# EAGLE board Select-Fire Rapidstrike (EAGLE 9.4.2)
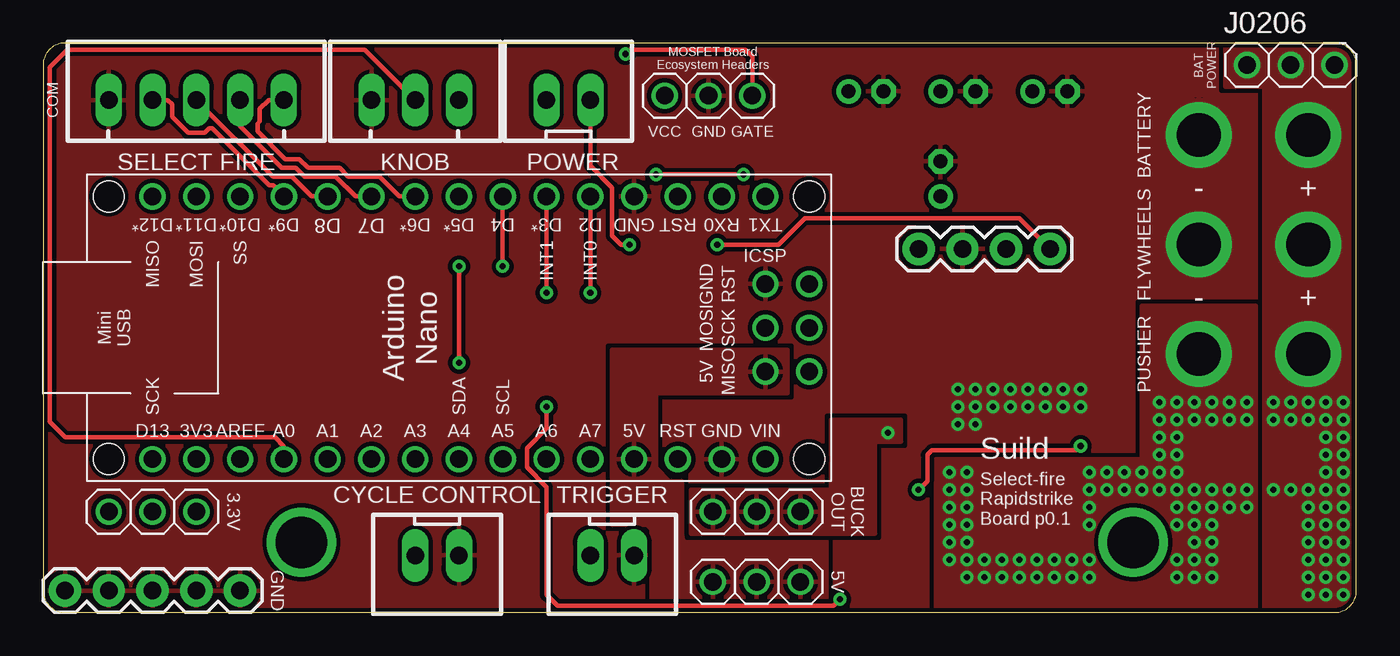
[diagram p0: board, top side]
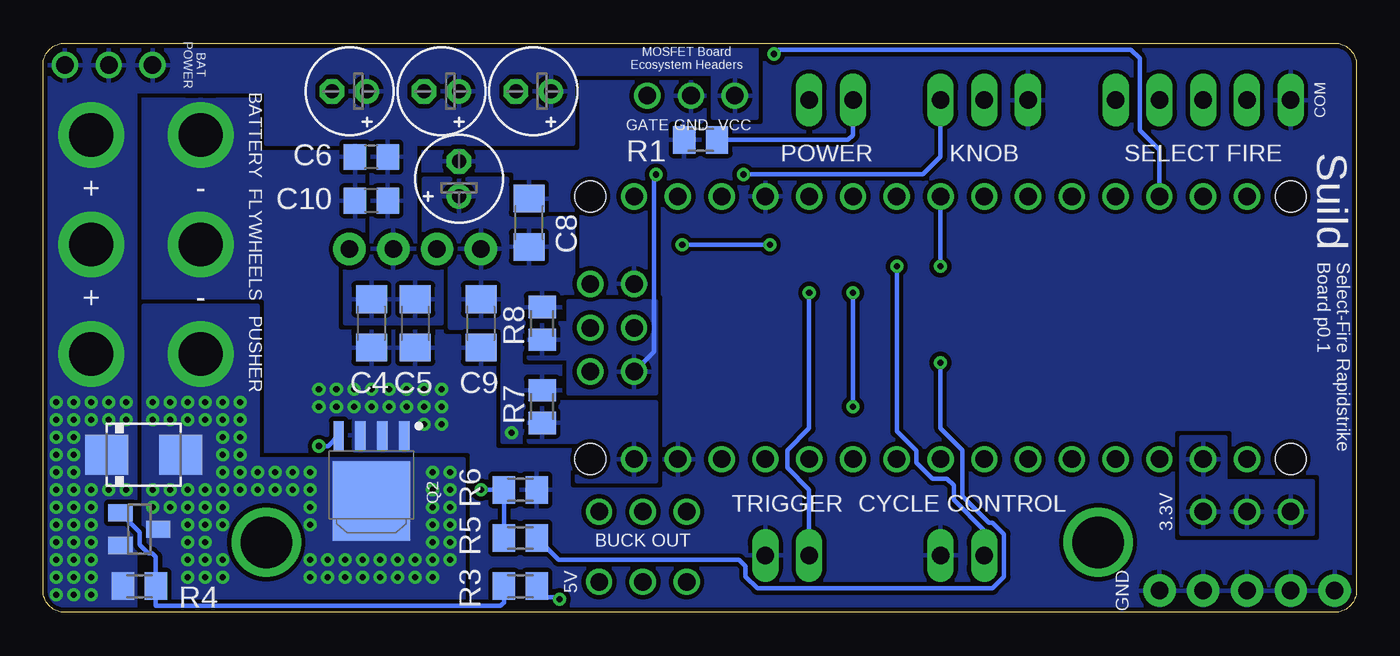
[diagram p1: board, bottom side, seen from below]

Size 76.2 x 33.02 mm. Coordinates in mm from the lower left corner, seen from the top.
Outline: 1.27,0 74.93,0 arc90 76.2,1.27 76.2,31.75 arc90 74.93,33.02 1.27,33.02 arc90 0,31.75 0,1.27 arc90 1.27,0
Copper layers (1*16): Top 0.035mm / dielectric 1.5mm / Bottom 0.035mm
Design rules "default *": minimum track width 10mil, minimum drill 0.35mm, track to track 10mil, track to pad 10mil, pad to pad 10mil, via to via 10mil, smd to smd 10mil, copper to edge 10mil, drill to drill 10mil, minimum pad ring 10mil, minimum via ring 8mil, stop-mask expansion 4mil, vias tented up to drill 30mil, thermal gap 10mil

## Footprints (pad centres in the part's own frame; a part is rotated, then mirrored left to right if it is on the bottom)
E2-5 = drill 0.813 pad 1.422: + -1.016,0 | drill 0.813 pad 1.422 octagon: - 1.016,0
C1206 = smd 1.6 x 1.8: 1 -1.4,0; 2 1.4,0
C0805 = smd 1.3 x 1.5: 1 -0.95,0; 2 0.95,0
DO214AA = smd 2.5 x 2.3: A 2.15,0; C -2.15,0
MOUNT-HOLE-2.5MM = drill 2.54 pad 3.81: P$1 0,0
MOUNT_HOLE_3MM = drill 2.997: P$1 0,0
1X04 = drill 1.016 pad 1.88: 1 0,0; 2 2.54,0; 3 5.08,0; 4 7.62,0
JST-XH-02-PACKAGE-LONG-PAD = drill 1.016 long: 1 -1.27,0; 2 1.27,0
JST-XH-03-PACKAGE-LONG-PAD = drill 1.016 long: 1 -2.54,0; 2 0,0; 3 2.54,0
JST-XH-05-PACKAGE-LONG-PAD = drill 1.016 long: 1 -5.08,0; 2 -2.54,0; 3 0,0; 4 2.54,0; 5 5.08,0
1X03 = drill 1.016: 1 -2.54,0; 2 0,0; 3 2.54,0
1X05 = drill 1.016 pad 1.88: 1 0,0; 2 2.54,0; 3 5.08,0; 4 7.62,0; 5 10.16,0
SOT-23 = smd 1 x 1.4: 1 -0.95,-1.1; 2 0.95,-1.1; 3 0,1.1
TO127P600X120-5N = smd 1.65 x 0.6: 1 -2.65,1.905; 2 -2.65,0.635; 3 -2.65,-0.635; 4 -2.65,-1.905 | smd 4.6 x 4.5: 5 1.15,0
M0805 = smd 1.3 x 1.6: 1 -0.95,0; 2 0.95,0
ARDUINO_NANO = drill 1.016: P1 -7.62,16.51; P2 -7.62,13.97; P3 -7.62,11.43; P4 -7.62,8.89; P5 -7.62,6.35; P6 -7.62,3.81; P7 -7.62,1.27; P8 -7.62,-1.27; P9 -7.62,-3.81; P10 -7.62,-6.35; P11 -7.62,-8.89; P12 -7.62,-11.43; P13 -7.62,-13.97; P14 -7.62,-16.51; P15 -7.62,-19.05; P16 7.62,-19.05; P17 7.62,-16.51; P18 7.62,-13.97; P19 7.62,-11.43; P20 7.62,-8.89; P21 7.62,-6.35; P22 7.62,-3.81; P23 7.62,-1.27; P24 7.62,1.27; P25 7.62,3.81; P26 7.62,6.35; P27 7.62,8.89; P28 7.62,11.43; P29 7.62,13.97; P30 7.62,16.51; P31 -2.54,19.05; P32 -2.54,16.51; P33 0,19.05; P34 0,16.51; P35 2.54,19.05; P36 2.54,16.51 | hole 1.778: -7.62,19.05; 7.62,19.05; -7.62,-21.59; 7.62,-21.59

## Placement (x,y rotation side)
C1  47uF  [E2-5]  58.42,30.23 180 bottom
C2  47uF  [E2-5]  53.09,30.23 180 bottom
C3  47uF  [E2-5]  47.75,30.23 180 bottom
C4  10uF  [C1206]  57.15,16.76 270 bottom
C5  10uF  [C1206]  54.61,16.76 270 bottom
C6  1uF  [C0805]  57.15,26.42 180 bottom
C7  47uF  [E2-5]  52.07,25.15 90 bottom
C8  10uF  [C1206]  48.01,22.61 90 bottom
C9  10uF  [C1206]  50.8,16.76 270 bottom
C10  0.1uF  [C0805]  57.15,23.88 180 bottom
D1  [DO214AA]  70.36,9.14 0 bottom
H1  B+  [MOUNT-HOLE-2.5MM]  73.41,27.69 0 top
H2  B-  [MOUNT-HOLE-2.5MM]  67.06,21.34 0 top
H3  M+  [MOUNT-HOLE-2.5MM]  73.41,14.99 0 top
H4  M+  [MOUNT-HOLE-2.5MM]  67.06,27.69 0 top
H5  MOUNT_HOLE_3MM  [MOUNT_HOLE_3MM]  14.99,4.06 0 top
H6  MOUNT_HOLE_3MM  [MOUNT_HOLE_3MM]  63.25,4.06 0 top
H7  M+  [MOUNT-HOLE-2.5MM]  73.41,21.34 0 top
H8  M-  [MOUNT-HOLE-2.5MM]  67.06,14.99 0 top
J1  BUCK  [1X04]  58.42,21.08 180 top
J2  POWER  [JST-XH-02-PACKAGE-LONG-PAD]  30.48,29.72 0 top
J7  POT  [JST-XH-03-PACKAGE-LONG-PAD]  21.59,29.72 0 top
J8  TRIGGER  [JST-XH-02-PACKAGE-LONG-PAD]  33.02,3.3 180 top
J9  CYCLE CONTROL  [JST-XH-02-PACKAGE-LONG-PAD]  22.86,3.3 180 top
J10  SELECT FIRE  [JST-XH-05-PACKAGE-LONG-PAD]  8.89,29.72 0 top
J0205  [1X03]  38.61,29.97 0 top
J0206  [1X03]  72.39,31.75 0 top
J0207  [1X03]  41.4,5.84 0 top
J0208  [1X03]  41.4,1.78 180 top
J0209  [1X03]  6.35,5.84 0 top
J0210  [1X05]  1.27,1.27 0 top
Q1  SSM3J358RLFCT-ND  [SOT-23]  70.61,4.83 270 bottom
Q2  PSMN1R5-30YLC  [TO127P600X120-5N]  57.15,7.62 270 bottom
R1  0  [M0805]  38.05,27.41 0 bottom
R3  100  [M0805]  48.51,1.52 180 bottom
R4  10k  [M0805]  70.61,1.52 180 bottom
R5  100  [M0805]  48.51,4.32 180 bottom
R6  10k  [M0805]  48.51,7.11 180 bottom
R7  0  [M0805]  47.24,11.94 270 bottom
R8  0  [M0805]  47.24,16.76 270 bottom
U2  ARDUINO_NANO  [ARDUINO_NANO]  25.4,16.51 270 top

## Library data of the parts
C1-C3 C7 J0205-J0209 R1 R3-R7 = adafruit
C4 C5 C8 C9 = eagle-ltspice; SPICEMODEL: NONE; SPICEPREFIX: C
C6 C10 = rcl; SPICEPREFIX: C
D1 = s2x_10; MF: Fairchild; MPN: S2A; OC_FARNELL: 1467485; OC_NEWARK: 58K2391
H1-H8 Q2 U2 = my-eagle-lib
J1 = SparkFun-Connectors; PROD_ID: CONN-09696
J2 J7-J10 = Rembrandt Electronics - JST XH Connectors v1-0
J0210 = SparkFun-Connectors
Q1 = bt_transistor
R8 = adafruit; STUFF: NO_STUFF

## Nets
BUCK_EN: J1.1 J2.2
BUCK_EN_SW: J2.1 R1.2
CYC_CTRL_IN: J9.2 U2.P7
GND: C1.- C2.- C3.- C4.2 C5.2 C6.2 C7.- C8.2 C9.2 C10.2 H2.P$1 H4.P$1 J1.3 J7.1 J8.1 J9.1 J10.1 J0205.2 J0210.1 J0210.2 J0210.3 J0210.4 J0210.5 Q2.1 Q2.2 Q2.3 R1.1 R6.1 U2.P4 U2.P29 U2.P32
HI_SIDE_GATE: Q1.1 R3.2 R4.1
LOW_SIDE_GATE: Q2.4 R5.2 R6.2
MOSFET_BOARD_GATE: J0205.3 U2.P13
MOTOR_BRAKE: R3.1 U2.P6
MOTOR_DRIVE: R5.1 U2.P8
POT_IN: J7.2 U2.P19
PP3V3_AR: J0209.1 J0209.2 J0209.3 U2.P17
PP5V0_AR: J7.3 J0208.1 J0208.2 J0208.3 R8.2 U2.P27 U2.P36
PP_BATT: C1.+ C2.+ C3.+ C4.1 C5.1 C6.1 C10.1 D1.C H1.P$1 H3.P$1 H7.P$1 J1.2 J0205.1 J0206.1 J0206.2 J0206.3 Q1.2 R4.2
PP_BUCK_OUT: C7.+ C8.1 C9.1 J1.4 J0207.1 J0207.2 J0207.3 R7.1 R8.1
PUSHER_NEG: D1.A H8.P$1 Q1.3 Q2.5
SEL_FR_<0>: J10.5 U2.P9
SEL_FR_<1>: J10.4 U2.P10
SEL_FR_<2>: J10.3 U2.P11
SEL_FR_<3>: J10.2 U2.P12
TRIG_IN: J8.2 U2.P5
VIN_AR: R7.2 U2.P30

## Tracks (layer width: path | path; a pad name or v marks a point on that pad's centre or on a via)
BUCK_EN  (via drill 0.35)
  Top 0.254: J1.1 56.64,22.86 44.2,22.86 42.67,21.34 v39.12,21.34 | J2.2 31.75,25.91 33.02,24.64 33.02,21.84 33.53,21.34 v34.04,21.34
  Bottom 0.254: v34.04,21.34 v39.12,21.34
BUCK_EN_SW
  Bottom 0.254: R1.2 29.49,27.41 29.21,27.69 J2.1
CYC_CTRL_IN  (via drill 0.35)
  Top 0.254: v26.67,20.07 U2.P7
  Bottom 0.254: v26.67,20.07 26.67,10.51 25.53,9.36 25.53,8.67 24.6,7.75 23.75,7.75 23.37,7.37 23.37,6.52 21.59,4.74 J9.2
GND  (via drill 0.35)
  other vias: 54.1,10.92 54.1,11.94 55.12,11.94 53.09,10.92 53.09,11.94 58.17,11.94 57.15,11.94 56.13,11.94 60.2,11.94 59.18,11.94 54.1,12.95 55.12,12.95 53.09,12.95 58.17,12.95 57.15,12.95 56.13,12.95 60.2,12.95 59.18,12.95
  pour Bottom (rank 6, no thermals): 52.58,9.4 58.17,9.4 58.17,11.43 60.71,11.43 60.71,13.46 52.58,13.46
  pour Bottom (rank 6, no thermals): 63.75,18.29 70.36,18.29 70.36,29.72 63.75,29.72
  pour Top (rank 6, no thermals): 52.58,13.46 52.58,9.4 58.17,9.4 58.17,11.43 60.71,11.43 60.71,13.46
  pour Top (rank 6, no thermals): 63.75,29.72 70.36,29.72 70.36,18.29 63.75,18.29
  pour Top (rank 6): -0.51,-0.51 -0.51,33.53 76.71,33.53 76.71,-0.51
  pour Bottom (rank 6): -0.51,33.53 76.71,33.53 76.71,-0.51 -0.51,-0.51
HI_SIDE_GATE
  Bottom 0.254: Q1.1 70.59,4.66 70.59,3.91 70.12,3.44 69.88,3.44 69.66,3.22 R4.1 69.66,0.38 49.66,0.38 49.53,0.51 49.46,0.57 R3.2
LOW_SIDE_GATE  (via drill 0.35)
  Top 0.254: v50.8,7.11 51.31,7.62 51.31,9.14 51.56,9.4 59.94,9.4 v60.2,9.65
  Bottom 0.254: Q2.4 59.67,9.65 v60.2,9.65 | v50.8,7.11 | v50.8,7.11 R6.2 R5.2
MOSFET_BOARD_GATE  (via drill 0.35)
  Top 0.254: J0205.3 41.15,32.26 40.77,32.64 34.03,32.64 v33.78,32.39
  Bottom 0.254: U2.P13 11.43,26.83 12.57,27.98 12.57,32.13 13.08,32.64 33.53,32.64 v33.78,32.39
MOTOR_BRAKE  (via drill 0.35)
  Top 0.254: U2.P6 v29.21,18.54 | v29.21,11.94 29.21,10.67 28.07,9.53 28.07,8.42 29.21,7.27 29.21,1.02 29.84,0.38 45.85,0.38 v46.23,0.76
  Bottom 0.254: v29.21,18.54 v29.21,11.94 | R3.1 47.56,0.89 46.35,0.89 v46.23,0.76
MOTOR_DRIVE  (via drill 0.35)
  Top 0.254: v24.13,14.48 v24.13,20.07
  Bottom 0.254: R5.1 46.29,3.05 35.81,3.05 35.43,2.67 35.43,2.07 34.76,1.4 21.12,1.4 20.45,2.07 20.45,4.54 21.12,5.21 21.34,5.21 22.86,6.73 22.86,9.4 24.13,10.67 v24.13,14.48 | v24.13,20.07 U2.P8
POT_IN
  Top 0.254: J7.2 18.67,32.64 1.4,32.64 0.38,31.62 0.38,11.05 1.27,10.16 13.46,10.16 13.97,9.65 U2.P19
PP3V3_AR
  pour Bottom: 7.62,10.16 10.16,10.16 10.16,4.57 2.54,4.57 2.54,7.62 7.62,7.62
PP5V0_AR  (via drill 0.35)
  Top 0.254: v35.56,25.4 v40.64,25.4
  Bottom 0.254: J7.3 24.13,26.42 25.15,25.4 v35.56,25.4 | U2.P36 40.77,15.11 40.77,25.27 v40.64,25.4
  pour Top (rank 3): 33.02,5.08 33.02,15.24 43.18,15.24 43.18,12.7 35.56,12.7 35.56,8.38 36.32,7.62 37.08,7.62 37.08,4.32 45.47,4.32 45.47,0.76 35.31,0.76 35.31,4.83 35.05,5.08
  pour Bottom: 40.64,12.7 45.72,12.7 45.72,14.73 48.01,14.73 48.01,16.76 45.72,16.76 45.72,18.03 40.64,18.03
PP_BATT  (via drill 0.35)
  other vias: 75.44,4.06 75.44,3.05 75.44,2.03 75.44,1.02 75.44,8.13 75.44,7.11 75.44,6.1 75.44,5.08 74.42,4.06 74.42,3.05 74.42,2.03 74.42,1.02 74.42,8.13 74.42,7.11 74.42,6.1 74.42,5.08 73.41,4.06 73.41,3.05 73.41,2.03 73.41,1.02 73.41,6.1 73.41,5.08 71.37,12.19 71.37,11.18 73.41,12.19 73.41,11.18 72.39,12.19 72.39,11.18 75.44,12.19 75.44,11.18 75.44,10.16 75.44,9.14 74.42,12.19 74.42,11.18 74.42,10.16 74.42,9.14 71.37,7.11 73.41,7.11 72.39,7.11
  pour Bottom: 34.8,33.27 76.45,33.27 76.45,29.46 70.87,29.46 70.87,30.23 63.25,30.23 63.25,27.18 57.15,27.18 57.15,20.57 58.67,20.57 58.67,16.76 53.09,16.76 53.09,20.57 54.61,20.57 54.61,27.18 45.47,27.18 45.47,31.24 37.34,31.24 37.34,28.7 34.8,28.7
  pour Bottom (no thermals): 70.87,30.23 76.45,30.23 76.45,-0.25 70.87,-0.25
  pour Top (no thermals): 68.58,33.27 76.45,33.27 76.45,-0.25 70.87,-0.25 70.87,30.48 68.58,30.48
PP_BUCK_OUT  (via drill 0.35)
  other vias: 49.02,10.41
  pour Bottom (rank 3): 49.28,25.15 54.1,25.15 54.1,21.84 52.58,21.84 52.58,16.51 49.53,16.51 49.53,9.91 48.26,9.91 48.26,12.45 45.47,12.45 45.47,22.86 49.28,22.86
  pour Top: 37.59,7.11 37.59,4.57 48.26,4.57 48.26,9.91 49.78,9.91 49.78,11.18 45.72,11.18 45.72,7.11
PUSHER_NEG  (via drill 0.35)
  other vias: 53.59,2.03 53.59,3.05 54.61,3.05 52.58,7.11 52.58,8.13 52.58,4.06 52.58,5.08 52.58,6.1 53.59,7.11 53.59,8.13 53.59,4.06 53.59,5.08 53.59,6.1 58.67,3.05 59.69,2.03 59.69,3.05 60.71,3.05 58.67,2.03 55.63,3.05 56.64,2.03 56.64,3.05 57.66,3.05 55.63,2.03 60.71,5.08 60.71,6.1 54.61,2.03 57.66,2.03 67.82,4.06 67.82,3.05 66.8,3.05 66.8,5.08 66.8,4.06 66.8,2.03 67.82,2.03 60.71,2.03 65.79,2.03 66.8,6.1 65.79,6.1 65.79,3.05 66.8,7.11 65.79,5.08 64.77,12.19 66.8,11.18 67.82,11.18 66.8,12.19 65.79,12.19 65.79,11.18 69.85,12.19 68.83,12.19 69.85,11.18 67.82,12.19 68.83,11.18 64.77,11.18 69.85,6.1 69.85,7.11 65.79,9.14 68.83,6.1 65.79,10.16 67.82,5.08 67.82,6.1 64.77,10.16 64.77,9.14 52.58,3.05 60.71,7.11 60.71,8.13 61.72,8.13 61.72,7.11 63.75,8.13 62.74,8.13 62.74,7.11 63.75,7.11 65.79,7.11 65.79,8.13 64.77,8.13 64.77,7.11 67.82,7.11 68.83,7.11
  pour Bottom (rank 2, no thermals): 63.75,17.78 70.36,17.78 70.36,-0.25 51.82,-0.25 51.82,8.89 63.75,8.89
  pour Top (rank 2, no thermals): 63.75,17.78 70.36,17.78 70.36,-0.25 51.82,-0.25 51.82,8.89 63.75,8.89
SEL_FR_<0>
  Top 0.254: U2.P9 20.67,24.13 19.52,25.27 17.7,25.27 17.19,25.78 15.37,25.78 14.86,26.29 14.05,26.29 12.45,27.9 12.45,28.36 12.57,28.48 12.57,29.21 13.08,29.72 J10.5
SEL_FR_<1>
  Top 0.254: U2.P10 18.13,24.13 16.98,25.27 15.16,25.27 14.65,25.78 13.84,25.78 11.43,28.19 J10.4
SEL_FR_<2>
  Top 0.254: J10.3 13.34,25.27 14.44,25.27 15.59,24.13 U2.P11
SEL_FR_<3>
  Top 0.254: U2.P12 13.34,24.77 13.12,24.77 9.8,28.09 9.64,28.09 9.36,27.81 8.42,27.81 7.49,28.74 7.49,29.46 7.24,29.72 J10.2
TRIG_IN  (via drill 0.35)
  Top 0.254: v31.75,18.54 U2.P5
  Bottom 0.254: J8.2 31.75,7.11 33.02,8.38 33.02,9.4 31.75,10.67 v31.75,18.54
VIN_AR
  pour Bottom: 40.64,7.62 45.21,7.62 45.21,9.91 48.01,9.91 48.01,12.19 40.64,12.19

## Text on the board
tNames: BAT / POWER | MOSFET Board / Ecosystem Headers | COM | VCC | GND | GATE | BATTERY | SELECT FIRE | KNOB | POWER | - | + | FLYWHEELS | - | + | PUSHER | Suild | 3.3V | CYCLE CONTROL | TRIGGER | BUCK / OUT | Select-fire / Rapidstrike / Board p0.1 | 5V | GND
bNames: BAT / POWER | MOSFET Board / Ecosystem Headers | COM | VCC | GND | GATE | BATTERY | Suild | SELECT FIRE | KNOB | POWER | - | + | FLYWHEELS | Select-Fire Rapidstrike / Board p0.1 | - | + | PUSHER | 3.3V | CYCLE CONTROL | TRIGGER | BUCK OUT | 5V | GND